# Altium PCB BEE-PC_EXP_V100.PcbDoc (part 7 of 7)
Units mm, origin at the board's own origin, x right, y up, seen from the top; angles counter-clockwise.
Board outline 180 x 79.98 mm, 6 copper layers (L1 TOP, L2 GND 1, L3 SIGNAL, L4 PWR, L5 GND 2, L6 BOT), stack 1.536 mm thick; 1146 components, 909 nets, 3933 pads, 1234 vias.
Unrouted connection lines stored in the file: 1783.
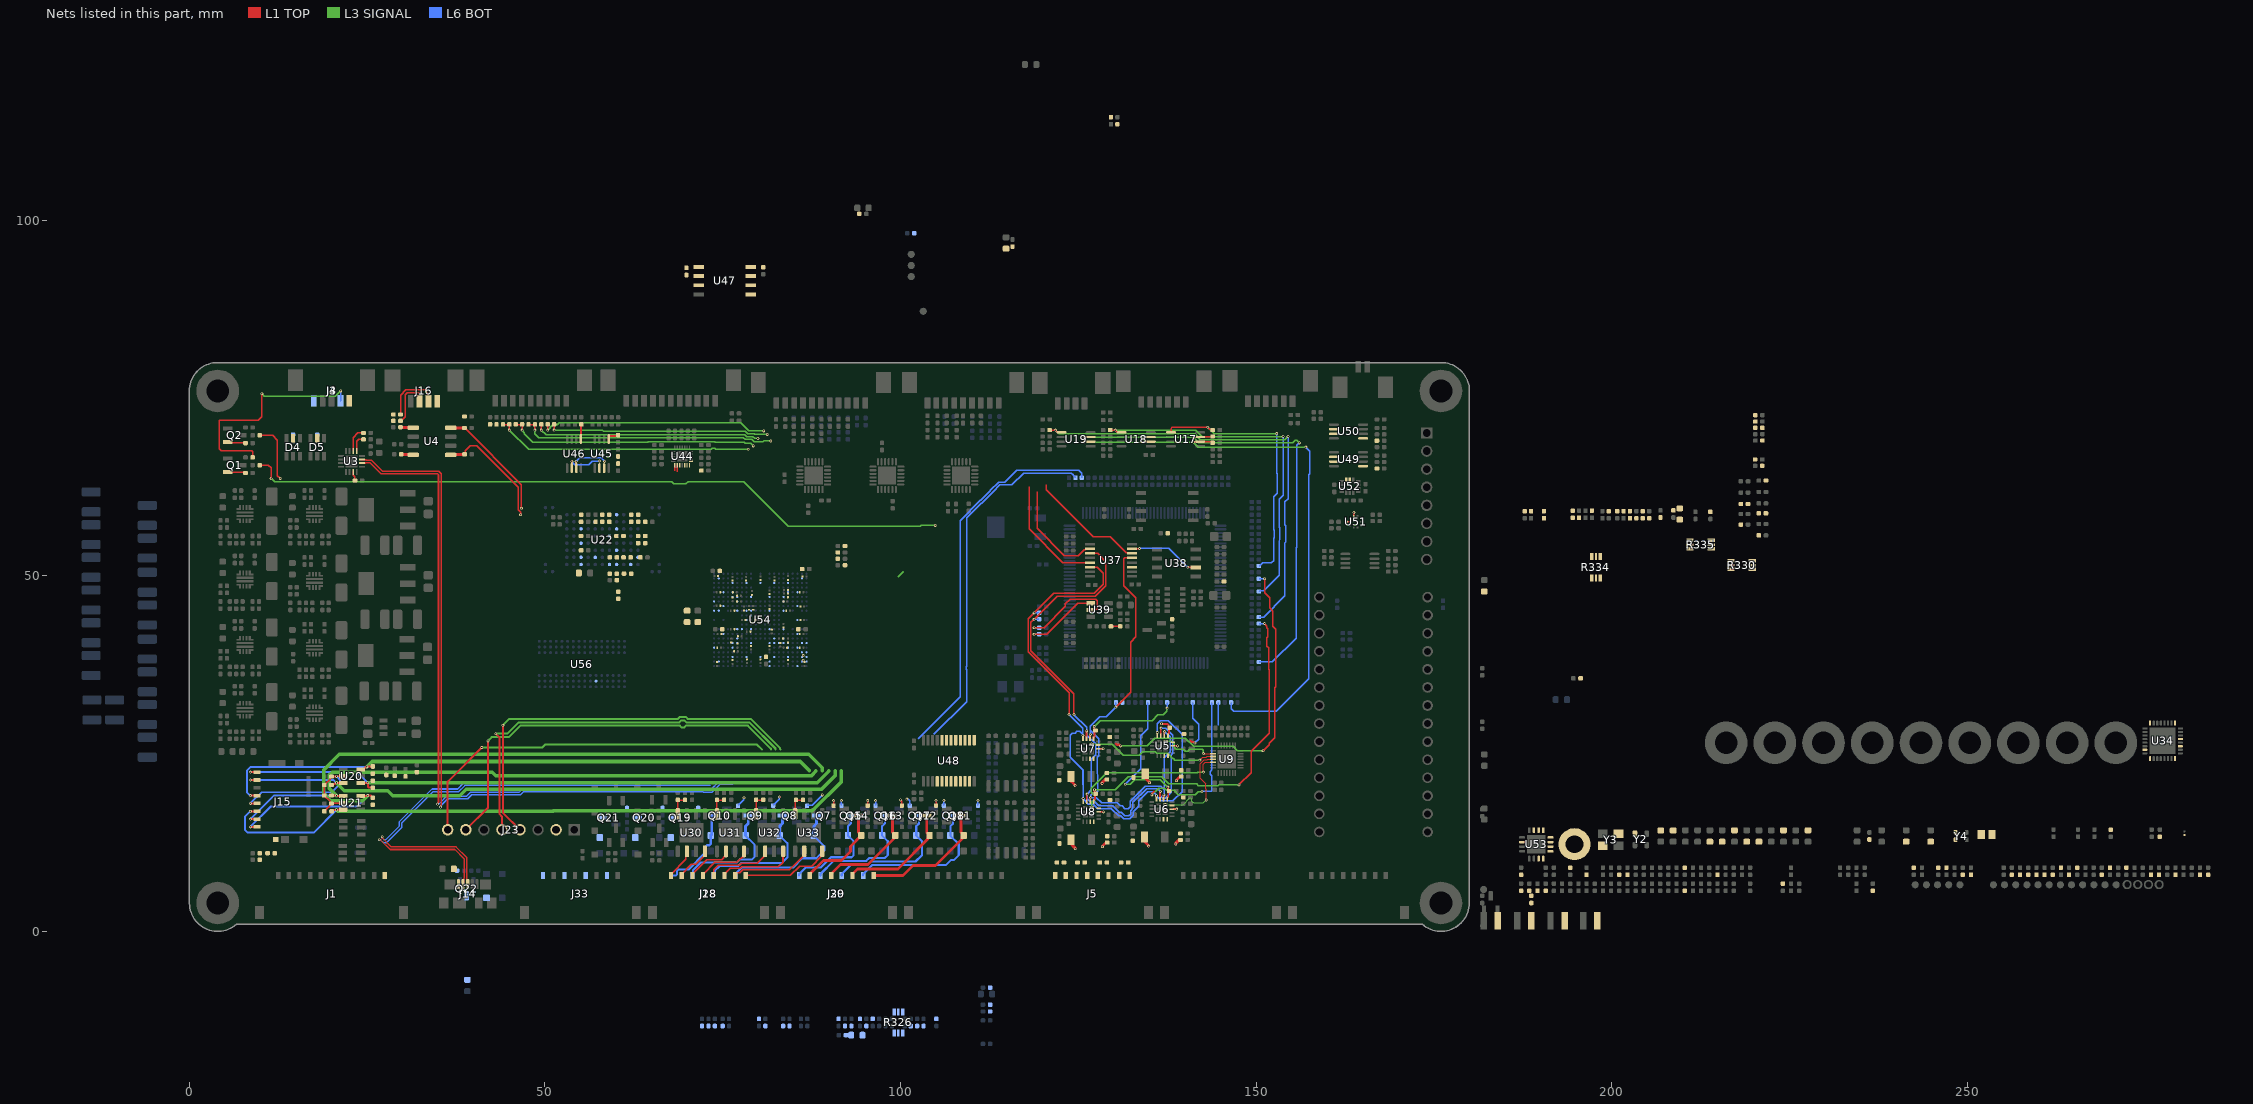
[diagram p7: the nets of this part, all layers, seen from the top]

## Via types
v1: diameter 0.6, hole 0.3, L1 TOP to L6 BOT, 563 vias
v2: diameter 0.4, hole 0.2, L1 TOP to L6 BOT, tented both sides, 344 vias
v3: diameter 0.4, hole 0.2, L1 TOP to L6 BOT, 327 vias

## Nets (pads, with @x,y where several pads share a name; then routed paths per layer and width w, separated by ;. In a path a pad name is that pad's centre, name@x,y a point inside that pad or via, vN(x,y) a via of type N, cw(c..) or ccw(c..) an arc to the next point about the centre after c; other vN are vias at no path point) (continued)
PRAM_SCK: U37.7 U38.6 | length 10.1
  L1 TOP w0.2: U37.7@132.565,53.837 133.593,53.837 v3(133.606,53.85) ; v3(140.4,51.2) 140.418,51.182 141.507,51.182 U38.6@141.524,51.165
  L6 BOT w0.2: v3(133.606,53.85) 137.75,53.85 v3(140.4,51.2)
SD2_CLK: J15.P5 R195.1 R544.1 U20.3 | length 86.6
  L1 TOP w0.28: v3(8.6,19.1) J15.P5@9.5,19.1 ; U20.3@24.134,22.775 24.444,22.775 24.792,23.123 24.956,23.123 25.002,23.169 25.744,23.169 R195.1@25.8,23.225
  L3 SIGNAL w0.5: v3(24.979,23.146) 25.733,23.9 85.9,23.9 87.2,22.6
  L6 BOT w0.28: v3(8.6,19.1) 8.11,19.59 8.11,22.603 8.653,23.146 v3(24.979,23.146)
SD2_CMD: J15.P3 R196.1 R541.1 U21.6 | length 94.1
  L1 TOP w0.28: v3(8.6,16.9) J15.P3@9.5,16.9 ; R196.1@20.025,16.9 20.179,17.054 20.621,17.054 20.668,17.1 v3(20.7,17.1) ; 20.904,17.125 U21.6@21.624,17.125
  L3 SIGNAL w0.5: v3(20.7,17.1) 20.924,16.876 51.109,16.876 51.233,17 81.417,17 81.467,16.95 87.599,16.95 91.7,21.051 91.7,22.6
  L6 BOT w0.28: v3(8.6,16.9) 7.8,16.1 7.8,14.3 8.2,13.9 17.5,13.9 v3(20.7,17.1)
SD2_DATA0: J15.P7 R191.1 R545.1 U20.6 | length 87.6
  L1 TOP w0.28: v3(8.6,21.3) J15.P7@9.5,21.3 ; R191.1@20.025,20.6 20.179,20.754 20.476,20.754 20.599,20.877 20.677,20.877 v3(20.7,20.9) 20.713,20.887 21.611,20.887 U20.6@21.624,20.875
  L3 SIGNAL w0.5: v3(20.7,20.9) 21.8,19.8 27.9,19.8 28.6,19.1 38.051,19.1 38.951,20 88.9,20 90.8,21.9 90.8,22.6
  L6 BOT w0.28: v3(8.6,21.3) 20.268,21.3 20.668,20.9 v3(20.7,20.9)
SD2_DATA1: J15.P8 R192.1 R552.1 U20.1 | length 85.9
  L1 TOP w0.28: v3(8.6,22.4) J15.P8@9.5,22.4 ; U20.1@24.134,20.875 24.147,20.887 25.087,20.887 v3(25.1,20.9) 25.1,20.374 25.264,20.21 25.765,20.21 R192.1@25.8,20.175
  L3 SIGNAL w0.5: v3(25.1,20.9) 88.29,20.9 89.9,22.51 89.9,22.6
  L6 BOT w0.28: v3(8.6,22.4) 23.6,22.4 v3(25.1,20.9)
SD2_DATA2: J15.P1 R193.1 R553.1 U21.3 | length 103.4
  L1 TOP w0.28: v3(8.6,14.7) J15.P1@9.5,14.7 ; U21.3@24.134,19.025 24.186,19.077 25.077,19.077 v3(25.1,19.1) 25.545,19.1 25.8,18.845 R193.1@25.8,18.825
  L3 SIGNAL w0.5: v3(25.1,19.1) 24.4,18.4 19.9,18.4 18.9,19.4 18.9,22.7 21.1,24.9 87.1,24.9 89,23 89,22.6
  L6 BOT w0.28: v3(8.6,14.7) 11.49,17.59 23.59,17.59 v3(25.1,19.1)
SD2_DATA3: J15.P2 R194.1 R554.1 U21.4 | length 88.4
  L1 TOP w0.28: v3(8.6,15.8) J15.P2@9.5,15.8 ; R194.1@20.025,19.1 v3(20.7,19.1) 20.723,19.077 21.572,19.077 U21.4@21.624,19.025
  L3 SIGNAL w0.5: v3(20.7,19.1) 19.7,20.1 19.7,22 20.1,22.4 42.6,22.4 43.1,21.9 87.49,21.9 88.1,22.51 88.1,22.6
  L6 BOT w0.28: v3(8.6,15.8) 11.9,19.1 v3(20.7,19.1)
SD2_nCD: J15.P9 R197.2 R555.1
SENSE1_N: R334.4 U53.12
SENSE1_P: R334.3 U53.11
SENSE2_N: R335.4 U53.14
SENSE2_P: R335.3 U53.13
SENSE3_N: R326.4 U53.7
SENSE3_P: R326.3 U53.8
SENSE4_N: R330.4 U53.9
SENSE4_P: R330.3 U53.10
SENSOR1_EN: R55.2 R178.1 U17.5 | length 37.2
  L1 TOP w0.2: U17.5@138.05,70.175 138.05,70.783 138.167,70.9 v3(143.2,70.9) 143.457,70.643 143.732,70.643 R178.1@143.875,70.5
  L3 SIGNAL w0.2: v3(143.2,70.9) 144.1,70 v3(152.9,70)
  L6 BOT w0.2: R55.2@150.45,51.4 150.502,51.4 150.802,51.7 150.811,51.7 150.961,51.85 152.15,51.85 152.458,52.158 152.458,55.29 152.55,55.382 152.55,56.418 152.458,56.51 152.458,61.094 152.95,61.586 152.95,61.7 152.95,64.389 152.9,64.439 v3(152.9,70)
SENSOR2_EN: R57.2 R182.1 U18.5 | length 49.3
  L1 TOP w0.2: R182.1@129.525,70.5 v3(130.231,70.5) 130.556,70.175 U18.5@131.102,70.175
  L3 SIGNAL w0.2: v3(130.231,70.5) 141.515,70.5 142.465,69.55 153.696,69.55 153.746,69.6 v3(153.8,69.6)
  L6 BOT w0.2: R57.2@150.45,47.8 150.525,47.875 151.075,47.875 153.258,50.058 153.258,54.959 153.35,55.051 153.35,56.749 153.258,56.841 153.258,60.763 153.8,61.305 153.8,61.7 v3(153.8,69.6)
SENSOR3_EN: R38.2 R111.1 U49.5 | length 22.7
  L1 TOP w0.25: v2(135.35,19.2) 135.379,19.229 135.379,19.415 135.663,19.7 135.675,19.7
  L3 SIGNAL w0.2: v2(135.35,19.2) 136.3,20.15 137.114,20.15 137.414,19.85 138.486,19.85 139.086,19.25 141.48,19.25 141.9,19.67 142.37,19.67 v3(142.4,19.7)
  L6 BOT w0.2: v3(142.4,19.7) 143.683,19.7 143.8,19.817 143.8,21.864 143.55,22.114 143.55,22.486 143.8,22.736 R38.2@143.8,32.175
SENSOR4_EN: R40.2 R507.1 U50.5
SENSOR5_EN: R58.2 R190.1 U19.5 | length 62.8
  L1 TOP w0.2: R190.1@121.007,70.5 v3(121.778,70.5) 122.103,70.175 U19.5@122.65,70.175
  L3 SIGNAL w0.2: v3(121.778,70.5) 122.316,69.962 141.374,69.962 142.186,69.15 154.05,69.15 v3(154.5,69.6)
  L6 BOT w0.2: R58.2@150.45,44.2 151.075,44.2 154.058,47.183 154.058,54.628 154.15,54.719 154.15,57.081 154.058,57.172 154.058,60.431 154.5,60.873 154.5,61.7 v3(154.5,69.6)
SENSOR_I2C1_SCL: R62.1 R171.2 U17.2 U18.2 U19.2 U49.2 U50.2 U51.2 U52.13 | length 83.3
  L1 TOP w0.2: v3(125.812,68.812) 125.867,68.812 125.913,68.859 U19.2@126.734,68.859 ; v3(134.265,68.812) 134.319,68.812 134.365,68.859 U18.2@135.186,68.859 ; v3(141.2,68.8) 141.254,68.8 141.3,68.846 142.121,68.846 U17.2@142.15,68.875 142.179,68.846 143.729,68.846 R171.2@143.875,68.7 ; U51.2@163.75,58.387 v3(163.75,58.9)
  L3 SIGNAL w0.2: v3(125.812,68.812) v3(134.265,68.812) 134.271,68.806 141.194,68.806 141.9,68.1 v3(157,68.1)
  L6 BOT w0.2: R62.1@146.5,32.175 146.5,31.3 146.85,30.95 152.816,30.95 157.4,35.534 157.4,61.7 157.4,64.198 157.55,64.348 157.55,67.55 v3(157,68.1)
SENSOR_I2C1_SDA: R59.1 R170.2 U17.3 U18.3 U19.3 U49.3 U50.3 U51.4 U52.14 | length 70.3
  L1 TOP w0.2: v3(125.812,69.513) 125.825,69.525 U19.3@126.75,69.525 ; v3(134.265,69.513) 134.277,69.525 U18.3@135.202,69.525 ; v3(141.2,69.5) 141.212,69.513 142.138,69.513 U17.3@142.15,69.525 142.179,69.554 143.829,69.554 R170.2@143.875,69.6 ; v3(162.7,57.6) U51.4@163.213,57.6
  L3 SIGNAL w0.2: v3(125.812,69.513) v3(134.265,69.513) 134.271,69.506 141.194,69.506 141.95,68.75 155.143,68.75 155.493,69.1 155.7,69.1 v3(156.1,68.7)
  L6 BOT w0.2: R59.1@150.45,37.9 152.3,37.9 155.658,41.258 155.658,53.965 155.75,54.057 155.75,68.343 156.1,68.693 v3(156.1,68.7)
SHDN: R304.1 U54.R9
SHIELD: H16.1 J1.11
SOL_1_OUT1: J18.1 U30.6 | length 4.3
  L1 TOP w0.2: J18.1@67.75,7.87 67.75,8.07 69.825,10.145 69.825,11.125 U30.6@69.965,11.265
SOL_1_OUT2: J18.2 U30.8 | length 5.1
  L1 TOP w0.2: J18.2@69.25,7.87 69.25,8.07 70.596,9.416 71.181,9.416 72.505,10.74 U30.8@72.505,11.265
SOL_1_VREF: R271.2 R272.1 U30.4 | length 3
  L1 TOP w0.2: U30.4@68.695,16.535 68.698,16.538 68.698,18.46 68.7,18.463 R272.1@69.8,18.463
SOL_2_OUT1: J18.3 U31.6 | length 6.5
  L1 TOP w0.2: J18.3@70.75,7.87 70.75,8.07 72.78,10.1 74.837,10.1 75.465,10.728 U31.6@75.465,11.253
SOL_2_OUT2: J18.4 U31.8 | length 7.6
  L1 TOP w0.2: J18.4@72.25,7.87 72.25,8.07 73.88,9.7 76.977,9.7 78.005,10.728 U31.8@78.005,11.253
SOL_2_VREF: R274.2 R275.1 U31.4 | length 3
  L1 TOP w0.2: U31.4@74.195,16.523 74.198,16.525 74.198,18.448 74.2,18.451 R275.1@75.3,18.451
SOL_3_OUT1: J18.5 U32.6 | length 9.4
  L1 TOP w0.2: J18.5@73.75,7.87 73.75,8.67 74.38,9.3 77.324,9.3 77.64,9.616 79.841,9.616 80.965,10.74 U32.6@80.965,11.265
SOL_3_OUT2: J18.6 U32.8 | length 10.7
  L1 TOP w0.2: J18.6@75.25,7.87 75.25,8.07 76.08,8.9 77.49,8.9 77.66,9.07 82.85,9.07 83.505,9.725
  L1 TOP w0.28: 83.505,9.725 U32.8@83.505,11.265
SOL_3_VREF: R277.2 R278.1 U32.4 | length 3
  L1 TOP w0.2: U32.4@79.695,16.535 79.698,16.538 79.698,18.46 79.7,18.463 R278.1@80.8,18.463
SOL_4_OUT1: J18.7 U33.6 | length 11.5
  L1 TOP w0.2: J18.7@76.75,7.87 76.75,8.07 76.95,8.27 77.426,8.27 77.826,8.67 84.395,8.67 85.135,9.41
  L1 TOP w0.28: 85.135,9.41 86.465,10.74 U33.6@86.465,11.265
SOL_4_OUT2: J18.8 U33.8 | length 12.5
  L1 TOP w0.2: J18.8@78.25,7.87 84.526,7.87 85.856,9.2 87.5,9.2 88.81,10.51 88.81,10.519 88.996,10.705 U33.8@89.005,10.705
  L1 TOP w0.28: U33.8@89.005,10.705 U33.8@89.005,11.265
SOL_4_VREF: R280.2 R281.1 U33.4 | length 3
  L1 TOP w0.2: U33.4@85.195,16.535 85.198,16.538 85.198,18.46 85.2,18.463 R281.1@86.3,18.463
SOLENOID_A_1: DZ1.1 J28.2 Q7.3 | length 19.8
  L6 BOT w0.3: J28.2@76.75,7.87 76.75,8.07 77.68,9 84.893,9 86.193,10.3 88.182,10.3 89.3,11.418 89.3,11.995 87.82,13.475 DZ1.1@87.82,13.5
  L6 BOT w0.4: DZ1.1@87.82,13.525 87.82,14.798 88.2,15.178 Q7.3@88.2,16.3
SOLENOID_A_2: DZ2.1 J28.4 Q8.3 | length 18.2
  L6 BOT w0.3: J28.4@73.75,7.87 73.9,8.02 73.9,8.524 74.576,9.2 77.173,9.2 77.573,9.6 83.3,9.6 84.1,10.4 84.1,12.395 83.02,13.475 DZ2.1@83.02,13.5
  L6 BOT w0.4: DZ2.1@83.02,13.525 83.02,14.797 83.4,15.177 Q8.3@83.4,16.3
SOLENOID_A_3: DZ3.1 J28.6 Q9.3 | length 16.7
  L6 BOT w0.3: J28.6@70.75,7.87 70.828,7.948 70.828,8.628 71.9,9.7 76.966,9.7 77.366,10.1 79.106,10.1 79.5,10.494 79.5,12.195 78.22,13.475 DZ3.1@78.22,13.5
  L6 BOT w0.4: DZ3.1@78.22,13.525 78.22,14.797 78.6,15.177 Q9.3@78.6,16.3
SOLENOID_A_4: DZ4.1 J28.8 Q10.3 | length 12.4
  L6 BOT w0.3: J28.8@67.75,7.87 68.424,7.87 68.6,8.046 68.6,8.515 68.805,8.72 70.213,8.72 72.52,11.027 72.52,11.862 72.783,12.125 73.144,12.125 73.32,12.301 DZ4.1@73.32,13.5
  L6 BOT w0.4: DZ4.1@73.32,13.525 73.46,13.665 73.46,16.2 73.56,16.3 Q10.3@73.7,16.3
SOLENOID_A_5: DZ5.1 J29.2 Q11.3 | length 20.9
  L6 BOT w0.3: J29.2@94.75,7.87 94.75,8.07 96.005,9.325 106.382,9.325 107.084,10.027 107.498,10.027 108.2,10.729 108.2,12.295 107.02,13.475 DZ5.1@107.02,13.5 ; DZ5.1@107.02,13.525 107.02,14.798 107.4,15.178 Q11.3@107.4,16.3
SOLENOID_A_6: DZ6.1 J29.4 Q12.3 | length 18.6
  L6 BOT w0.3: J29.4@91.75,7.87 91.75,8.07 93.105,9.425 95.398,9.425 95.798,9.825 102.107,9.825 103.02,10.738 103.02,12.675 102.22,13.475 DZ6.1@102.22,13.5 ; DZ6.1@102.22,13.525 102.22,14.798 102.6,15.178 Q12.3@102.6,16.3
SOLENOID_A_7: DZ7.1 J29.6 Q13.3 | length 16.8
  L6 BOT w0.3: J29.6@88.75,7.87 88.75,8.07 90.605,9.925 95.191,9.925 95.591,10.325 97.807,10.325 98.22,10.738 98.22,12.675 97.42,13.475 DZ7.1@97.42,13.5 ; DZ7.1@97.42,13.525 97.42,14.798 97.8,15.178 Q13.3@97.8,16.3
SOLENOID_A_8: DZ8.1 J29.8 Q14.3 | length 15
  L6 BOT w0.3: J29.8@85.75,7.87 85.75,8.07 86.68,9 88.8,9 90.225,10.425 93.107,10.425 93.42,10.738 93.42,12.675 92.62,13.475 DZ8.1@92.62,13.5 ; DZ8.1@92.62,13.525 92.62,14.798 93,15.178 Q14.3@93,16.3
SOLENOID_A_9: DZ9.1 J30.2 Q15.3 | length 13.1
  L1 TOP w0.4: J30.2@87.25,7.87 87.25,8.07 89.18,10 91.7,10 92.965,11.265 92.965,11.96 94.48,13.475 DZ9.1@94.48,13.5 94.48,13.525 94.1,13.905 Q15.3@94.1,16.3
SOLENOID_A_10: DZ10.1 J30.4 Q16.3 | length 14.6
  L1 TOP w0.4: J30.4@90.25,7.87 90.25,8.07 91.58,9.4 95.448,9.4 99.03,12.982 99.03,13.25 DZ10.1@99.28,13.5 99.28,13.525 98.9,13.905 Q16.3@98.9,16.3
SOLENOID_A_11: DZ11.1 J30.6 Q17.3 | length 16.4
  L1 TOP w0.4: J30.6@93.25,7.87 93.25,8.07 93.98,8.8 99.648,8.8 103.83,12.982 103.83,13.25 DZ11.1@104.08,13.5 104.08,13.525 103.7,13.905 Q17.3@103.7,16.3
SOLENOID_A_12: DZ12.1 J30.8 Q18.3 | length 18.1
  L1 TOP w0.4: J30.8@96.25,7.87 100.351,7.87 101.777,9.295 104.944,9.295 108.63,12.982 108.63,13.25 DZ12.1@108.88,13.5 108.88,13.525 108.5,13.905 Q18.3@108.5,16.3
SOLENOID_A_13: DZ13.1 J33.2 Q19.3
SOLENOID_A_14: DZ14.1 J33.4 Q20.3
SOLENOID_A_15: DZ15.1 J33.6 Q21.3
SOLENOID_A_16: DZ16.1 J33.8 Q22.3
SOLENOID_CTR_1: R479.2 U48.16 | length 0.7
  L6 BOT w0.2: R479.2@91.7,17.725 v3(91.7,18.4)
SOLENOID_CTR_2: R480.2 U48.8 | length 2.7
  L6 BOT w0.2: R480.2@86.9,17.725 87.561,17.725 89,19.164 v3(89,19.2)
SOLENOID_CTR_3: R481.2 U48.6 | length 1.5
  L6 BOT w0.2: R481.2@82.1,17.725 82.1,17.75 82.962,18.612 82.962,18.862 v3(83,18.9)
SOLENOID_CTR_4: R482.2 U48.4 | length 1.4
  L6 BOT w0.2: R482.2@77.2,17.725 77.2,17.75 77.962,18.512 77.962,18.762 v3(78,18.8)
SOLENOID_CTR_5: R487.2 U48.7 | length 0.7
  L6 BOT w0.2: R487.2@110.9,17.725 v3(110.9,18.4)
SOLENOID_CTR_6: R488.2 U48.9 | length 0.7
  L6 BOT w0.2: R488.2@106.1,17.725 v3(106.1,18.4)
SOLENOID_CTR_7: R489.2 U48.14 | length 1.1
  L6 BOT w0.2: v3(100.9,18.6) 100.938,18.562 101.088,18.562 101.3,18.35 R489.2@101.3,17.725
SOLENOID_CTR_8: R490.2 U48.15 | length 0.7
  L6 BOT w0.2: R490.2@96.5,17.725 v3(96.5,18.4)
SOLENOID_CTR_9: R495.2 U48.13 | length 0.7
  L1 TOP w0.2: R495.2@90.6,17.725 v3(90.6,18.4)
SOLENOID_CTR_10: R496.2 U48.11 | length 0.7
  L1 TOP w0.2: R496.2@95.4,17.725 v3(95.4,18.4)
SOLENOID_CTR_11: R497.2 U48.10 | length 0.9
  L1 TOP w0.2: v3(100,18.5) 100,18.49 100.2,18.29 R497.2@100.2,17.725
SOLENOID_CTR_12: R498.2 U48.5 | length 0.7
  L1 TOP w0.2: R498.2@105,17.725 v3(105,18.4)
SOLENOID_CTR_13: R508.2 U48.17
SOLENOID_CTR_14: R509.2 U48.18
SOLENOID_CTR_15: R510.2 U48.19
SOLENOID_CTR_16: R511.2 U48.20
SOM_CAM_CK_N: R349.1 U44.7 | length 0.9
  L1 TOP w0.18: 68.59,64.659 68.59,65.326 68.6,65.336 U44.7@68.6,65.55
SOM_CAM_CK_P: R351.1 U44.6 | length 0.8
  L1 TOP w0.18: U44.6@68.25,65.55 68.25,65.336 68.26,65.326 68.26,64.795
SOM_CAM_D0_N: R353.1 U44.10
SOM_CAM_D0_P: R355.1 U44.8
SOM_CAM_D1_N: R356.1 U44.12
SOM_CAM_D1_P: R357.1 U44.11
SOM_CAM_I2C_EN1: R466.1 R565.1 U45.5 | length 1.8
  L1 TOP w0.28: U45.5@58.975,69.25 58.975,69.605 59.007,69.637 60.136,69.637 60.295,69.796 R466.1@60.295,69.816
SOM_CAM_I2C_EN2: R473.1 R566.1 U46.5 | length 2
  L1 TOP w0.28: U46.5@55.075,69.25 55.075,69.55 55.088,69.563 55.088,71.237 R473.1@55.127,71.275
SOM_CAM_I2C_SCL: R459.2 R558.1 U45.2 U46.2 | length 5.3
  L1 TOP w0.2: U46.2@53.775,65.15 53.788,65.162 53.788,66.088 v3(53.8,66.1)
  L6 BOT w0.2: v3(53.8,66.1) 53.8,66.064 54.214,65.65 56.164,65.65 56.664,66.15 v3(57.675,66.15)
SOM_CAM_I2C_SDA: R458.2 R559.1 U45.3 U46.3 | length 5.4
  L1 TOP w0.2: v3(54.4,66.1) 54.413,66.087 54.413,65.162 U46.3@54.425,65.15
  L6 BOT w0.2: v3(54.4,66.1) 54.9,66.6 57.9,66.6 v3(58.4,66.1)
SOM_CAM_MIPI_SEL: R319.2 R567.1 U44.13
SOM_CONSOLE_RX: J16.3 R210.1 R557.1 | length 7.2
  L1 TOP w0.2: R210.1@29.725,71.8 29.777,71.8 30.077,72.1 30.086,72.1 30.361,72.375 30.361,75.468 30.636,75.742 32.258,75.742 32.375,75.625 J16.3@32.375,74.55
SOM_CONSOLE_TX: J16.2 R209.1 R556.1 | length 8.2
  L1 TOP w0.2: R209.1@29.725,72.7 29.725,75.397 30.47,76.142 33.184,76.142 33.625,75.701 J16.2@33.625,74.55
SOM_EMMC_nRST: R208.1 R374.1 U22.M5@61.086,55.6
SOM_MRAM_QSPI_CLK: R468.1 U47.6
SOM_MRAM_QSPI_IO0: R465.1 U47.5
SOM_MRAM_QSPI_IO1: R464.1 U47.2
SOM_MRAM_QSPI_IO2: R462.1 U47.3
SOM_MRAM_QSPI_IO3: R456.1 U47.7
SOM_PHOTO_ADC_CONV: R301.2 R316.1 R470.1 | length 36.5
  L1 TOP w0.2: R316.1@44.1,71.275 45,71.275 v3(45,70.5)
  L3 SIGNAL w0.2: v3(45,70.5) 47.7,67.8 73.364,67.8 73.514,67.95 73.886,67.95 74.036,67.8 v3(78.6,67.8)
SOM_PHOTO_ADC_EOC: R302.2 R317.1 R560.1
SOM_PHOTO_ADC_nCS: R300.2 R315.1 R383.1 | length 35.3
  L1 TOP w0.2: R315.1@45.9,71.275 46.8,71.275 v3(46.8,70.5)
  L3 SIGNAL w0.2: v3(46.8,70.5) 46.8,70.446 47.1,70.146 47.1,70 48.3,68.8 64.464,68.8 64.514,68.85 73.886,68.85 73.936,68.8 78.003,68.8 78.168,68.635 78.936,68.635 v3(79.3,68.271)
SOM_PHOTO_SPI_MISO: R311.1 R377.1 | length 31.7
  L1 TOP w0.2: v3(49.5,70.5) R311.1@49.5,71.275
  L3 SIGNAL w0.2: v3(49.5,70.5) 50.158,69.842 78.092,69.842 78.355,69.579 79.26,69.579 79.483,69.356 79.912,69.356 v3(79.95,69.318)
SOM_PHOTO_SPI_MOSI: R309.1 R375.1 | length 32.1
  L1 TOP w0.2: v3(50.4,70.5) R309.1@50.4,71.275
  L3 SIGNAL w0.2: v3(50.4,70.5) 51.125,71.225 51.75,71.225 52.05,71.525 77.541,71.525 78.687,70.379 v3(80.78,70.379)
SOM_PHOTO_SPI_SCK: R307.1 R380.1 | length 31
  L1 TOP w0.2: v3(51.3,70.5) R307.1@51.3,71.275
  L3 SIGNAL w0.2: v3(51.3,70.5) 58.064,70.5 58.264,70.3 78.2,70.3 78.521,69.979 79.426,69.979 79.507,69.898 v3(81.27,69.898)
SOM_PHOTO_SW_nCS: R299.2 R313.1 R373.1 | length 35.8
  L1 TOP w0.2: R313.1@47.7,71.275 48.6,71.275 v3(48.6,70.5)
  L3 SIGNAL w0.2: v3(48.6,70.5) 48.6,70 49.158,69.442 77.927,69.442 78.19,69.179 79.095,69.179 79.406,68.868 80.687,68.868 80.783,68.964 v3(81.76,68.964)
SOM_PRAM_nCS: R530.1 R538.1 U37.3
SOM_PRAM_SPI_MISO: R540.1 U37.13 | length 16.4
  L1 TOP w0.2: 118.1,62.5 118.1,56.6 122.825,51.875 U37.13@126.647,51.875
SOM_PRAM_SPI_MOSI: R539.1 U37.10 | length 14.6
  L1 TOP w0.2: 119.2,61.8 119.2,56.689 123.054,52.835 125,52.835 125.818,53.653 125.948,53.653 126.12,53.825 U37.10@126.647,53.825
SOM_PRAM_SPI_SCK: R537.1 U37.6 | length 16.4
  L1 TOP w0.2: 120.5,62.8 120.5,62.1 127.1,55.5 129.5,55.5 131.747,53.253 132.475,53.253 U37.6@132.553,53.175
SOM_RAM_QSPI_nCS: R467.1 R469.1 U47.1
SOM_SDMMC0_OUT_CK: R207.1 R371.1 U22.P6@63.086,54.6
SOM_SDMMC0_OUT_CMD: R206.1 R372.1 U22.P5@63.086,55.6
SOM_SDMMC0_OUT_D0: R205.1 R376.1 U22.K2@59.086,58.6
SOM_SDMMC0_OUT_D1: R204.1 R378.1 U22.N2@62.086,58.6
SOM_SDMMC0_OUT_D2: R203.1 R381.1 U22.K3@59.086,57.6
SOM_SDMMC0_OUT_D3: R202.1 R384.1 U22.N3@62.086,57.6
SOM_SDMMC0_OUT_D4: R201.1 R386.1 U22.N8@62.086,52.6
SOM_SDMMC0_OUT_D5: R200.1 R404.1 U22.K8@59.086,52.6
SOM_SDMMC0_OUT_D6: R199.1 R455.1 U22.N9@62.086,51.6 | length 1
  L3 SIGNAL w0.25: 99.7,49.862 100.4,50.562
SOM_SDMMC0_OUT_D7: R198.1 R457.1 U22.K9@59.086,51.6
SOM_SDMMC0_OUT_DS: R463.1 U22.K5@59.086,55.6
SOM_USB_LED_1: R86.1 R568.1 | length 99.7
  L1 TOP w0.2: R86.1@9.925,65.564 11.136,65.564 11.5,65.2 v3(11.5,63.7)
  L3 SIGNAL w0.2: v3(11.5,63.7) 12,63.2 67.836,63.2 68.086,62.95 69.836,62.95 70.136,63.25 77.94,63.25 84.19,57 102.8,57 102.9,57.1 v3(104.9,57.1)
SOM_USB_LED_2: R91.1 R475.1 | length 8.3
  L1 TOP w0.2: R91.1@9.925,69.764 11.736,69.764 12.4,69.1 12.4,64.1 v3(12.8,63.7)
SOM_USB_N: R345.1 U3.3 | length 101.5
  L1 TOP w0.22: U3.3@24.27,66.35 24.29,66.33 24.796,66.33 24.841,66.285 25.573,66.285 27.158,64.7 35.069,64.7 35.414,64.354 35.414,17.764 35.359,17.708 35.359,17.51 v3(35.324,17.476)
  L6 BOT w0.22: v3(35.324,17.476) 35.359,17.51 35.359,17.673 36.35,18.664 39.15,18.664 39.716,19.23 46.579,19.23 47.009,19.66 72.245,19.66 72.351,19.553 73.477,19.553 74.631,20.708 76.431,20.708
SOM_USB_P: R346.1 U3.2 | length 100.7
  L1 TOP w0.22: U3.2@24.27,65.85 24.29,65.87 24.796,65.87 24.841,65.915 25.419,65.915 27.004,64.33 34.915,64.33 35.044,64.201 35.044,18.093 34.9,17.949 v3(34.9,17.9)
  L6 BOT w0.22: v3(34.9,17.9) 34.934,17.934 35.097,17.934 36.197,19.034 38.997,19.034 39.563,19.6 46.426,19.6 46.856,20.03 72.398,20.03 72.504,19.923 73.323,19.923 74.478,21.078 76.278,21.078
SOM_USB_PWR_EN1: R96.1 R387.1 U4.1 | length 16.6
  L1 TOP w0.2: R96.1@38.675,67.1 38.768,67.193 38.768,67.568 39.5,68.3 40.4,68.3 46.25,62.45 46.25,59.314 46.595,58.969 v3(46.595,58.6)
  L1 TOP w0.4: U4.1@36.76,67.016 36.802,67.058 R96.1@38.633,67.058
SOM_USB_PWR_EN2: R95.1 R454.1 U4.4 | length 16.6
  L1 TOP w0.2: R95.1@38.675,70.8 R95.1@38.7,70.8 46.7,62.8 46.7,61.7 v3(46.7,59.5)
  L1 TOP w0.4: U4.4@36.76,70.826 36.773,70.813 38.662,70.813 R95.1@38.675,70.8
SOM_USB_SW_nOE: R84.2 R379.1 U3.15 | length 1.3
  L1 TOP w0.2: U3.15@23.05,64.63 23.08,64.6 23.08,64.136 23.275,63.941 R84.2@23.275,63.4
SOM_USB_SW_SEL0: R89.1 R382.1 U3.6 | length 3.6
  L1 TOP w0.2: U3.6@23.05,67.57 23.05,69.45 23.7,70.1 R89.1@24.475,70.1
SOM_USB_SW_SEL1: R88.1 R385.1 U3.5 | length 2.4
  L1 TOP w0.2: U3.5@23.55,67.57 23.55,68.95 23.8,69.2 R88.1@24.475,69.2
TCK_SWCLK_PC26: J23.5 U54.H7 | length 55.7
  L1 TOP w0.28: v3(43.1,27.8) 43.59,27.31 43.59,16.531 43.96,16.161 J23.5@43.96,14.3
  L3 SIGNAL w0.28: v3(43.1,27.8) 44.73,27.8 46.338,29.408 68.915,29.408 69.197,29.69 69.603,29.69 69.885,29.408 78.743,29.408 82.427,25.724 82.427,25.623 82.45,25.6
TDI_PC28: J23.4 U54.H6 | length 57.1
  L1 TOP w0.28: v3(44.1,29) 44.1,16.7 J23.4@46.5,14.3
  L3 SIGNAL w0.28: v3(44.1,29) 44.988,29.888 68.716,29.888 68.998,30.17 69.802,30.17 70.084,29.888 78.942,29.888 83.077,25.752 83.077,25.623 83.1,25.6
TDO_PC29: J23.7 U54.A2 | length 56.1
  L1 TOP w0.28: J23.7@38.88,14.3 42,17.42 v3(42,26.8)
  L3 SIGNAL w0.28: v3(42,26.8) 42.51,27.31 44.919,27.31 46.537,28.928 68.979,28.928 69.197,28.71 69.603,28.71 69.821,28.928 78.544,28.928 81.777,25.695 81.777,25.623 81.8,25.6
TEC_ADC_1: U5.20 U9.2 | length 8.1
  L1 TOP w0.15: v3(142.6,25) U9.2@143.965,25
  L3 SIGNAL w0.2: v2(137.325,26.75) 138.15,26.75 138.5,26.4 138.5,25.914 138.789,25.625 139.739,25.625 140.014,25.35 140.386,25.35 140.661,25.625 142.414,25.625 142.562,25.478 142.562,25.038 v3(142.6,25)
TEC_ADC_2: U7.20 U9.3 | length 18.7
  L1 TOP w0.15: v3(142.1,24.1) 142.485,24.485 143.024,24.485 143.139,24.6 U9.3@143.965,24.6
  L3 SIGNAL w0.2: v2(126.875,26.35) 129.75,26.35 131.3,24.8 133.6,24.8 134.1,25.3 135.814,25.3 136.064,25.05 137.036,25.05 137.599,25.05 138.1,24.549 138.1,24.514 138.364,24.25 138.399,24.25 138.549,24.1 v3(142.1,24.1)
TEC_ADC_3: U6.20 U9.4 | length 14.3
  L1 TOP w0.15: v3(142.988,18.488) 142.988,20.012 142.9,20.1 142.9,20.8 142.175,21.525 142.175,23.57 142.74,24.135 143.169,24.135 143.234,24.2 U9.4@143.965,24.2
  L3 SIGNAL w0.15: v2(137.225,17.85) 139.75,17.85 140.7,18.8 140.824,18.8 140.975,18.649 140.975,18.324 141.224,18.075 142.575,18.075 v3(142.988,18.488)
TEC_ADC_4: U8.20 U9.5 | length 22.3
  L1 TOP w0.15: v3(142.6,22.4) 142.6,23.5 142.885,23.785 143.95,23.785 U9.5@143.965,23.8
  L3 SIGNAL w0.2: v2(126.911,17.468) 126.911,18.14 127.3,18.529 127.3,19.1 126.836,19.564 126.836,20.105 129.032,22.3 141.7,22.3 141.8,22.4 v3(142.6,22.4)
TEC_nCS_1: R68.2 R97.2 U5.15 | length 5.8
  L1 TOP w0.25: v2(136.7,29.2) 136.712,29.188 137.527,29.188 137.673,29.041 137.673,28.652 137.75,28.575 137.75,27.86 137.6,27.71 U5.15@137.6,27.51
  L6 BOT w0.2: 144.7,29 R68.2@144.7,32.175
TEC_nCS_2: R70.2 R107.2 U7.15 | length 14.1
  L1 TOP w0.25: U7.15@127.15,27.11 127.15,27.31 127.3,27.46 127.3,28.175 127.263,28.212 127.263,28.788 v2(127.25,28.8)
  L3 SIGNAL w0.2: v2(127.25,28.8) 128.1,29.65 135.382,29.65 136.182,30.45 136.952,30.45 137.462,30.96 137.462,31.362 v3(137.5,31.4)
  L6 BOT w0.2: v3(137.5,31.4) R70.2@137.5,32.175
TEC_nCS_3: R72.2 R98.2 U6.15 | length 21.3
  L1 TOP w0.25: U6.15@137.5,18.61 137.5,18.81 137.65,18.96 137.65,19.675 137.612,19.712 137.612,20.288 v2(137.6,20.3)
  L3 SIGNAL w0.2: v3(131.6,20.7) 132.278,20.7 132.928,21.35 136.55,21.35 v2(137.6,20.3)
  L6 BOT w0.2: v3(131.6,20.7) 133.8,22.9 133.8,27.486 134.8,28.487 R72.2@134.8,32.175
TEC_nCS_4: R20.1 R108.2 U8.15 | length 49
  L1 TOP w0.2: v3(147.6,20.6) 149.3,22.3 149.3,25.336 151.86,27.897 151.86,36.767 151.75,36.877 151.75,39.886 151.5,40.136 151.5,41.308 151.65,41.458 151.65,42.586 151.5,42.736 151.5,42.946 151.2,43.246 v3(151.2,43.3)
  L1 TOP w0.25: U8.15@127.186,18.228 127.186,18.428 127.336,18.578 127.336,19.293 127.299,19.331 127.299,19.906 v2(127.286,19.918)
  L3 SIGNAL w0.2: v2(127.286,19.918) 130.182,19.918 132.014,21.75 136.716,21.75 137.716,20.75 141.65,20.75 141.9,20.5 144.673,20.5 144.773,20.6 v3(147.6,20.6)
  L6 BOT w0.2: R20.1@150.45,43.3 v3(151.2,43.3)
TEC_OUT_A_1: C39.2 C40.2 C51.2 J5.5 U5.8 U5.9 | length 0.8
  L1 TOP w0.4: v2(138.8,21.2) 138.8,21.298 139.302,21.8 C40.2@139.325,21.8
TEC_OUT_A_2: C61.2 C62.2 C73.2 J5.1 U7.8 U7.9 | length 0.8
  L1 TOP w0.4: v2(128.35,20.8) 128.35,20.898 128.852,21.4 C62.2@128.875,21.4
TEC_OUT_A_3: C41.2 C42.2 C52.2 J5.7 U6.8 U6.9 | length 0.8
  L1 TOP w0.4: v2(138.7,12.3) 138.7,12.398 139.202,12.9 C42.2@139.225,12.9
TEC_OUT_A_4: C63.2 C64.2 C74.2 J5.3 U8.8 U8.9 | length 0.8
  L1 TOP w0.4: v2(128.386,11.918) 128.386,12.016 128.888,12.518 C64.2@128.911,12.518
TEC_OUT_B_1: C51.1 C57.2 J5.6 L1.2 U5.12 | length 1.9
  L1 TOP w0.25: U5.12@138.475,26.1 v2(138.95,26.1)
  L1 TOP w0.4: L1.2@134.189,22.032 134.189,21.782 135,20.97 v2(135,20.9)
TEC_OUT_B_2: C73.1 C79.2 J5.2 L3.2 U7.12 | length 1.9
  L1 TOP w0.25: U7.12@128.025,25.7 v2(128.5,25.7)
  L1 TOP w0.4: L3.2@123.739,21.632 123.739,21.382 124.55,20.57 v2(124.55,20.5)
TEC_OUT_B_3: C52.1 C58.2 J5.8 L2.2 U6.12 | length 1.9
  L1 TOP w0.25: U6.12@138.375,17.2 v2(138.85,17.2)
  L1 TOP w0.4: L2.2@134.089,13.132 134.089,12.882 134.9,12.07 v2(134.9,12)
TEC_OUT_B_4: C74.1 C80.2 J5.4 L4.2 U8.12 | length 1.9
  L1 TOP w0.25: U8.12@128.061,16.818 v2(128.536,16.818)
  L1 TOP w0.4: L4.2@123.775,12.75 123.775,12.5 124.586,11.688 v2(124.586,11.618)
TEC_SPI_MISO: R76.2 R79.1 U5.18 U6.18 U7.18 U8.18 U37.14 | length 82.9
  L1 TOP w0.2: v3(123.7,30.5) 123.7,33.552 117.95,39.302 117.95,43.95 v3(118.8,44.8) 121.545,47.545 127.231,47.545 128.492,48.806 128.492,50.385 127.652,51.225 U37.14@126.647,51.225
  L6 BOT w0.2: v3(118.8,44.8) R76.2@119.475,44.8 ; v3(123.7,30.5) 125.612,28.588 125.612,27.763 125.65,27.725 v2(125.65,27.573) ; v2@125.612,27.725 125.186,28.15 124.814,28.15 124.564,27.9 124.164,27.9 123.85,27.586 123.85,24.514 125.65,22.713 ; 125.65,20.6 125.65,22.713 ; v2(136.1,27.973) 136.1,29.236 136.514,29.65 137.686,29.65 139.6,27.736 139.6,19.664 138.286,18.35 136.698,18.35 136,19.048 v2(136,19.073) 135.962,19.111 135.962,19.225 135.536,19.65 134.763,19.65 133.508,18.394 133.508,17.594 132.75,16.836 132.75,16.348 132.252,15.85 131.391,15.85 130.973,16.268 130.673,16.268 129.673,17.268 127.748,17.268 127.098,17.918 126.434,17.918 125.686,18.666 v2(125.686,18.691) 125.686,22.677 125.65,22.713
TEC_SPI_MOSI: R77.2 U5.17 U6.17 U7.17 U8.17 U37.11 | length 79.6
  L1 TOP w0.2: v3(124.4,30.5) 124.4,33.418 118.35,39.468 118.35,43.45 v3(118.8,43.9) 122.045,47.145 127.397,47.145 128.892,48.64 128.892,51.994 127.711,53.175 U37.11@126.647,53.175
  L1 TOP w0.25: U7.17@126.15,27.11 126.15,28.11 126.2,28.159 v2(126.2,28.2) ; U8.17@126.186,18.228 126.186,19.228 126.236,19.278 v2(126.236,19.318) ; U6.17@136.5,18.61 136.5,19.61 136.55,19.659 v2(136.55,19.7) ; U5.17@136.6,27.51 136.6,28.51 136.65,28.559 v2(136.65,28.6)
  L6 BOT w0.2: v3(118.8,43.9) R77.2@119.475,43.9 ; v3(124.4,30.5) 126.2,28.7 v2(126.2,28.2) 126.2,27.564 126.795,26.969 126.893,26.969 127.45,26.412 127.45,24.852 126.836,24.238 126.836,19.918 v2(126.236,19.318) 126.236,18.682 126.6,18.318 127.263,18.318 127.914,17.668 129.838,17.668 130.738,16.768 131.038,16.768 131.557,16.25 132.086,16.25 132.35,16.514 132.35,17.002 132.684,17.336 132.684,18.136 134.598,20.05 136.193,20.05 136.543,19.7 v2(136.55,19.7) 136.55,19.064 136.864,18.75 137.236,18.75 138.05,19.564 138.05,24.836 138.3,25.086 138.3,27.586 137.286,28.6 v2(136.65,28.6)
TEC_SPI_SCK: R74.2 U5.16 U6.16 U7.16 U8.16 U37.5 | length 66
  L1 TOP w0.2: v3(130.3,31.55) 132.35,33.6 132.35,40.686 133.1,41.436 133.1,46.944 131.431,48.614 131.431,52.408 131.548,52.525 U37.5@132.553,52.525
  L1 TOP w0.25: U7.16@126.65,27.11 126.65,27.609 126.7,27.659 v2(126.7,27.7) ; U8.16@126.686,18.228 126.686,18.728 126.736,18.778 v2(126.736,18.818) ; U6.16@137,18.61 137,19.109 137.05,19.159 v2(137.05,19.2) ; U5.16@137.1,27.51 137.1,28.009 137.15,28.059 v2(137.15,28.1)
  L6 BOT w0.2: v2@126.662,27.738 126.7,27.777 126.7,28.266 ; R74.2@130.3,32.175 v3(130.3,31.55) 128.949,30.199 128.013,30.199 126.7,28.886 126.7,28.266 ; v2(137.05,19.2) 137.088,19.238 137.088,19.692 137.089,19.693 137.089,19.928 ; v2(137.15,28.1) 137.9,27.35 137.9,25.252 137.089,24.441 137.089,19.928 ; 126.7,28.266 127.85,27.116 127.85,24.686 127.65,24.486 127.65,22.152 127.736,22.066 127.736,19.732 127.43,19.425 127.077,19.425 126.771,19.118 126.771,18.853 v2(126.736,18.818) 127.55,18.818 128.3,18.068 130.5,18.068 130.9,17.668 131.173,17.668 131.562,17.279 132.02,17.279 132.284,17.543 132.284,18.302 134.432,20.45 136.567,20.45 137.089,19.928
TEC_SWEN_1: R41.2 R103.1 U5.13 | length 7
  L1 TOP w0.3: 140.775,26.8 140.925,26.65 141.223,26.65 141.373,26.5 v2(141.4,26.5)
  L6 BOT w0.2: R41.2@141.1,32.175 141.1,29.954 141.95,29.104 141.95,27.05 v2(141.4,26.5)
TEC_SWEN_2: R113.1 R285.1 U7.13 | length 48.3
  L1 TOP w0.2: v3(151,25.4) 151.824,26.224 151.824,26.455 152.61,27.241 152.61,34.262 152.775,34.427 152.775,42.522 152.375,42.922 152.375,45.056 151.9,45.531 151.9,46.936 151.2,47.636 v3(151.2,49.6)
  L1 TOP w0.3: 130.325,26.4 130.475,26.25 130.773,26.25 130.923,26.1 v2(130.95,26.1)
  L3 SIGNAL w0.2: v2(130.95,26.1) 134.686,26.1 135.787,27.2 140.063,27.2 141.239,26.025 146.761,26.025 147.386,25.4 v3(151,25.4)
  L6 BOT w0.2: R285.1@150.45,49.6 v3(151.2,49.6)
TEC_SWEN_3: R47.2 R105.1 U6.13 | length 50.6
  L6 BOT w0.2: 104.7,27.7 109.324,32.324 109.324,36.806 109.274,36.856 109.274,37.229 109.324,37.279 109.324,58.141 111.388,60.204 111.437,60.204 112.933,61.7 113.05,61.817 113.05,61.853 113.983,62.786 115.674,62.786 117.338,64.45 124.036,64.45 124.3,64.186 124.3,64.177 124.6,63.877 R47.2@124.6,63.825
TEC_SWEN_4: R48.2 R115.1 U8.13 | length 54
  L6 BOT w0.2: 102.5,27.1 108.4,33 108.4,57.782 111.222,60.604 111.272,60.604 112.368,61.7 112.65,61.982 112.65,62.019 113.817,63.186 114.688,63.186 116.352,64.85 125.1,64.85 125.5,64.45 R48.2@125.5,63.825
"TEMP _SENSOR": R157.2 R527.2
TMS_SWDIO_PC27: J23.8 U54.C1 | length 53.4
  L1 TOP w0.28: J23.8@36.34,14.3 36.34,21.075 v3(41.13,25.865)
  L3 SIGNAL w0.28: v3(41.13,25.865) 49.62,25.865 50.045,26.29 79.81,26.29 80.5,25.6
USB1_N: J14.2 R341.1 | length 67.1
  L1 TOP w0.22: v3(26.7,12.9) 26.734,12.866 26.897,12.866 28.241,11.522 37.355,11.522 38.64,10.237 38.64,7.464 38.616,7.44 38.616,6.776 J14.2@38.5,6.66
  L6 BOT w0.22: v3(26.7,12.9) 26.734,12.866 26.897,12.866 27.264,12.498 27.753,12.498 29.872,14.617 29.872,15.249 34.287,19.664 37.887,19.664 38.753,20.53 73.253,20.53
USB1_P: J14.3 R342.1 | length 66.9
  L1 TOP w0.22: v3(27.124,13.324) 27.159,13.29 27.159,13.127 28.394,11.892 37.508,11.892 39.01,10.39 39.01,7.464 39.034,7.44 39.034,6.776 J14.3@39.15,6.66
  L6 BOT w0.22: v3(27.124,13.324) 27.159,13.29 27.159,13.127 27.418,12.868 27.6,12.868 29.502,14.77 29.502,15.402 34.134,20.034 37.734,20.034 38.6,20.9 73.1,20.9
USB_CONN_LED_1: J3.4 R87.2 | length 32.1
  L1 TOP w0.2: R87.2@8.925,66.664 8.925,67.483 8.808,67.6 4.5,67.6 4.2,67.9 4.2,71.783 4.317,71.9 9.7,71.9 9.717,71.883 10.2,72.366 v3(10.2,75.6)
  L3 SIGNAL w0.2: v3(10.2,75.6) 10.207,75.6 10.557,75.25 20.55,75.25 v3(21.3,76)
  L6 BOT w0.2: J3.4@21.25,74.6 21.3,74.65 v3(21.3,76)
USB_PWR1: C193.2 D4.5 J3.1 Q1.2 R85.1 R94.1 U4.8 | length 4.2
  L1 TOP w0.2: Q1.2@5.4,64.614 5.475,64.539 7.8,64.539 R85.1@7.875,64.464
  L1 TOP w0.4: R94.1@29.825,67.1 29.867,67.058 31.448,67.058 U4.8@31.49,67.016
USB_PWR2: C194.2 D5.5 J4.1 Q2.2 R90.1 R93.1 U4.5 | length 4.3
  L1 TOP w0.2: Q2.2@5.4,68.814 5.475,68.739 7.8,68.739 R90.1@7.875,68.664
  L1 TOP w0.4: R93.1@29.725,70.9 29.762,70.863 31.453,70.863 U4.5@31.49,70.826
USBA_N: R336.2 U54.B3 | length 0.3
  L6 BOT w0.15: U54.B3@86.15,38.6 v3(86.336,38.786)
USBA_P: R337.2 U54.A3
USBB_N: R341.2 U54.B4
USBB_P: R342.2 U54.A4
USBC_N: R345.2 U54.B6
USBC_P: R346.2 U54.A6
VDD_1V15_OUT3: C226.2 L7.2 R326.1 U34.25
VDD_1V15_OUT4: C228.2 L8.2 R330.1 U34.32
VDD_1V35: C224.2 L6.2 R335.1 U34.16
VDD_3V3: C116.2 C117.2 C118.2 C119.2 C122.2 C123.2 C124.2 C125.2 C126.2 C127.2 C128.2 C129.2 C130.2 C131.2 C132.2 C176.2 C192.2 C220.1 C221.1 C222.1 C223.1 C273.2 C285.2 D34.2 D35.2 J15.P4 J16.1 J23.2 L5.2 R191.2 R192.2 R193.2 R194.2 R195.2 R196.2 R197.1 R198.2 R199.2 R200.2 R201.2 R202.2 R203.2 R204.2 R205.2 R206.2 R207.2 R208.2 R209.2 R210.2 R298.1 R303.1 R312.1 R318.1 R323.2 R324.2 R331.2 R334.1 R339.2 R469.2 R476.2 R535.2 R542.2 R546.2 R548.2 R550.2 R570.2 R571.2 U20.5 U21.5 U22.F2@55.086,58.6 U22.F3@55.086,57.6 U22.F4@55.086,56.6 U22.F5@55.086,55.6 U22.F6@55.086,54.6 U22.F7@55.086,53.6 U22.F8@55.086,52.6 U22.F9@55.086,51.6 U22.H3@57.086,57.6 U22.H8@57.086,52.6 U22.L2@60.086,58.6 U22.L4@60.086,56.6 U22.L7@60.086,53.6 U22.L9@60.086,51.6 U22.P3@63.086,57.6 U22.P8@63.086,52.6 U34.9 U47.8 U53.2 U53.15 Y2.4 Y4.1 Y4.4 | length 25.4
  L1 TOP w0.254: R196.2@18.975,16.9 R196.2@19,16.9 19.816,17.716 19.816,17.829 C117.2@19.987,18 ; U21.5@21.624,18.075 21.587,18.038 20.037,18.038 C117.2@20,18 C117.2@19.987,18 ; U20.5@21.624,21.825 21.612,21.812 20.712,21.812 v3(20.7,21.8) 19.987,21.8 19.816,21.629 19.816,21.416 R191.2@19,20.6 18.975,20.6 18.975,19.1 R194.2@19,19.1 19.816,18.284 19.816,18.171 C117.2@19.987,18
  L1 TOP w0.28: v3(8.6,18) J15.P4@9.5,18
  L6 BOT w0.254: v3(8.6,18) 10.167,19.567 20.042,19.567 21.177,20.702 21.177,21.323 v3(20.7,21.8)
VDD_3V3_MPU: C233.1 C234.1 C241.1 C242.1 C243.1 C244.1 C245.1 C246.1 C247.1 C248.1 C249.1 R332.2 R333.2 R334.2 U54.C11 U54.C14 U54.C17 U54.F13 U54.H19 U54.J16 U54.N16 U54.T13 U54.W14
VDDANA: C253.2 C275.1 C276.1 C277.1 C283.1 C284.1 U54.E5 U54.E6 U54.G6 U54.J6 U54.T15 U54.T16
VDDBU: C281.1 R322.2 R343.2 R364.2 R370.2 U54.P11
VDDCORE: C250.1 C251.1 C252.1 C254.1 C255.1 C256.1 C257.1 C258.1 C259.1 C260.1 C261.1 C262.1 C263.1 C264.1 C265.1 C266.1 R326.2 U54.F6 U54.F9 U54.F15 U54.J9 U54.J13 U54.L3 U54.L19 U54.N13 U54.P19 U54.U16 U54.U17 U54.U19 U54.W17 U54.Y20
VDDCPU: C235.1 C236.1 C237.1 C238.1 C239.1 C240.1 R330.2 U54.B20 U54.E16 U54.E17 U54.E19 U54.F16
VDDIN33: C279.1 C280.1 R332.1 R364.1 U54.H3
VDDIODDR: C332.1 C333.1 C334.1 C335.1 C336.1 C337.1 C338.1 C339.1 C340.1 C341.1 C342.1 C343.1 C344.1 C345.1 C346.1 C348.1 C349.1 C350.1 R335.2 R574.1 R576.1 U54.AA5 U54.M11 U54.N6 U54.N9 U54.N12 U54.P3 U54.P13 U54.T6 U54.T7 U54.T9 U54.U3 U54.U5 U54.U6 U54.W8 U54.Y2
VDDUTMII: C267.1 C268.1 C269.1 C270.1 C272.1 C274.1 R333.1 U54.B2 U54.C5 U54.C8 U54.E3 U54.F7 | length 0.3
  L6 BOT w0.15: U54.B2@86.15,37.95 v3(86.336,38.136)
VLDO1: C231.1 U34.19
VLDO2: C232.1 U34.21
VUSB: J14.1 JP2.2
WD_DONE: R293.1 U39.4 | length 10.4
  L1 TOP w0.2: v3(118.8,41.8) 120.589,41.8 124.939,46.15 U39.4@126.745,46.15
  L6 BOT w0.2: v3(118.8,41.8) R293.1@119.475,41.8
WD_nRESET: R45.2 R394.2 R400.1 | length 1.3
  L1 TOP w0.2: R400.1@129.625,42.9 R394.2@130.875,42.9
WD_WAKE: R294.1 U39.5 | length 13.7
  L1 TOP w0.2: v3(118.8,42.7) 120.2,42.7 123.2,45.7 123.2,46.059 123.886,46.745 127.431,46.745 127.65,46.526 127.65,45.317 127.533,45.2 U39.5@126.745,45.2
  L6 BOT w0.2: v3(118.8,42.7) R294.1@119.475,42.7
WKUP: R322.1 U34.7 U54.AA15
XIN: R359.2 R362.2 U54.J2
XIN32: C271.1 R361.1 R363.2 U54.Y13 Y1.2
XIN_24M: C282.1 R362.1 R580.1 Y3.3
XOUT: R360.2 R369.2 U54.J1
XOUT32: C278.1 R361.2 U54.AA13 Y1.1
XOUT_24M: C286.1 R369.1 R580.2 Y3.1
ZQ_DDR: R573.1 U56.L8
pads on no net: J2.1 J2.7 J11.6 J12.6 J14.4 J15.14 J15.15 J23.1 J31.6 J32.6 TP5.0 TP6.0 TP7.0 TP8.0 TP9.0 TP10.0 TP11.0 TP12.0 TP13.0 TP14.0 TP15.0 TP18.0 TP20.0 TP22.0 TP25.0 TP26.0 TP27.0 TP28.0 TP29.0 TP30.0 TP31.0 TP32.0 TP33.0 TP34.0 U3.7 U3.8 U3.9 U3.10 U3.16 U4.2 U4.3 U9.10 U9.12 U9.13 U15.23 U15.24 U15.25 U15.26 U20.4 U21.1 U22.A1 U22.A2 U22.A9 U22.A10 U22.B1 U22.B10 U22.D2 U22.D3 U22.D4 U22.D5 U22.D6 U22.D7 U22.D8 U22.D9 U22.E2 U22.E3 U22.E4@54.086,56.6 U22.E5 U22.E6 U22.E7 U22.E8 U22.E9 U22.F2@55.086,58.6 U22.F3@55.086,57.6 U22.F4@55.086,56.6 U22.F5@55.086,55.6 U22.F6@55.086,54.6 U22.F7@55.086,53.6 U22.F8@55.086,52.6 U22.F9@55.086,51.6 U22.G2@56.086,58.6 U22.G3@56.086,57.6 U22.G4@56.086,56.6 U22.G5@56.086,55.6 U22.G6@56.086,54.6 U22.G7@56.086,53.6 U22.G8@56.086,52.6 U22.G9@56.086,51.6 U22.H2@57.086,58.6 U22.H3@57.086,57.6 U22.H4 U22.H5 U22.H6 U22.H7 U22.H8@57.086,52.6 U22.H9@57.086,51.6 U22.J2 U22.J3 U22.J4 U22.J5@58.086,55.6 U22.J6 U22.J7 U22.J8 U22.J9 U22.K2@59.086,58.6 U22.K3@59.086,57.6 U22.K4 U22.K5@59.086,55.6 U22.K6 U22.K7 U22.K8@59.086,52.6 U22.K9@59.086,51.6 U22.L2@60.086,58.6 U22.L3@60.086,57.6 U22.L4@60.086,56.6 U22.L5 U22.L6 U22.L7@60.086,53.6 U22.L8@60.086,52.6 U22.L9@60.086,51.6 U22.M2 U22.M3 U22.M4@61.086,56.6 U22.M5@61.086,55.6 U22.M6 U22.M7@61.086,53.6 U22.M8 U22.M9 U22.N2@62.086,58.6 U22.N3@62.086,57.6 U22.N4 U22.N5 U22.N6 U22.N7 U22.N8@62.086,52.6 U22.N9@62.086,51.6 U22.P2@63.086,58.6 U22.P3@63.086,57.6 U22.P4 U22.P5@63.086,55.6 U22.P6@63.086,54.6 U22.P7 U22.P8@63.086,52.6 U22.P9@63.086,51.6 U22.T1 U22.T10 U22.U1 U22.U2 U22.U9 U22.U10 U34.17 U36.8 U36.10 U40.4 U41.24 U42.3 U42.4 U42.10 U42.12 U42.20 U42.22 U42.24 U43.24 U52.2 U52.3 U52.9 U52.10 U52.11 U54.A15 U54.A16 U54.A20 U54.AA18 U54.AA19 U54.B13 U54.B15 U54.B18 U54.C2 U54.C3 U54.C4 U54.C7 U54.C18 U54.C19 U54.C20 U54.D2 U54.D3 U54.D4 U54.D7 U54.D16 U54.D17 U54.D21 U54.E4 U54.E8 U54.E14 U54.E18 U54.F3 U54.F4 U54.F14 U54.F18 U54.F19 U54.F21 U54.G3 U54.G4 U54.G8 U54.G9 U54.G12 U54.G14 U54.G16 U54.G19 U54.H12 U54.H15 U54.H18 U54.J11 U54.J14 U54.J20 U54.J21 U54.K7 U54.K8 U54.M12 U54.M13 U54.M14 U54.P9 U54.P10 U54.P12 U54.R12 U54.R13 U54.U14 U54.V15 U54.V19 U54.V20 U54.V21 U54.W11 U54.Y15 U54.Y19 U56.J1 U56.J9 U56.L1 U56.L9
copper on no net: | length 127.3
  L1 TOP w0.15: 144.2,20.925 144.2,20.951 144.7,21.451 144.7,22.265 ; 145.1,20.925 145.1,22.265
  L1 TOP w0.2: v3(131.9,39.3) 131.912,39.312 131.912,42.888 131.925,42.9
  L1 TOP w0.25: 123.361,19.218 123.411,19.268 124.261,19.268 124.311,19.318 124.324,19.306 124.324,18.531 v2(124.336,18.518) ; v2(125.036,18.818) 125.065,18.847 125.065,19.033 125.35,19.318 125.361,19.318 ; 127.825,26.2 128.4,26.2 128.6,26.4 129.275,26.4 129.275,27.3 ; 127.861,17.318 128.436,17.318 128.636,17.518 129.311,17.518 129.311,18.418 ; 133.675,19.6 133.725,19.65 134.575,19.65 134.625,19.7 134.637,19.688 134.637,18.913 v2(134.65,18.9) ; 133.775,28.5 133.825,28.55 134.675,28.55 134.725,28.6 134.737,28.588 134.737,27.813 v2(134.75,27.8) ; 138.175,17.7 138.75,17.7 138.95,17.9 139.625,17.9 139.625,18.8 ; 138.275,26.6 138.85,26.6 139.05,26.8 139.725,26.8 139.725,27.7
  L3 SIGNAL w0.2: 59,34.4 59.007,34.4 59.457,33.95 86.342,33.95 86.642,34.25 97.85,34.25 98.9,35.3 119.1,35.3 123.1,39.3 v3(131.9,39.3) ; v3(122.8,31.3) 126.52,31.3 126.77,31.05 130.896,31.05 131.146,31.3 v3(131.2,31.3)
  L6 BOT w0.2: v3(122.8,31.3) 122.8,26.178 123.3,25.678 123.3,24.498 125.036,22.762 v2(125.036,18.818) ; v2(124.336,18.518) 124.374,18.48 124.374,18.244 125.15,17.468 v2(125.961,17.468) ; v3(131.2,31.3) 131.2,32.175 ; v2(134.65,18.9) 134.65,18.266 135.066,17.85 v2(136.275,17.85) ; v2(134.75,27.8) 134.788,27.762 134.788,27.525 135.563,26.75 v2(136.375,26.75)

## Keep-outs
L1 TOP:
  rectangle: 10.163,13.495 16.363,22.895
Keep-Out Layer:
  lines w1: 6.618,1 173.382,1 ; 6.618,1.001 cw(c4,4) 0.02,3.978 0,76 cw(c4,76) 4,80 176,80 cw(c176,76) 180,76 180,4 ; 173.382,1.001 ccw(c176,4) 179.98,3.978

## Other copper
L1 TOP:
  region net GND: 22.292,43.665 18.192,43.665 15.965,43.665 15.9,43.6 15.9,43.2 16.035,43.065 17.593,43.065 17.693,42.965 17.693,40.565 17.951,40.562 17.951,41.623 18.193,41.865 18.193,42.866 18.392,43.065 19.492,43.065 19.692,42.865 19.692,41.065 19.892,40.865 22.092,40.865 22.292,41.065
  region net GND: 22.292,53.065 18.192,53.065 15.965,53.065 15.9,53 15.9,52.6 16.035,52.465 17.593,52.465 17.693,52.365 17.693,49.965 17.951,49.962 17.951,51.023 18.193,51.265 18.193,52.266 18.392,52.465 19.492,52.465 19.692,52.265 19.692,50.465 19.892,50.265 22.092,50.265 22.292,50.465
  region net GND: 22.292,62.465 18.192,62.465 15.965,62.465 15.9,62.4 15.9,62 16.035,61.865 17.593,61.865 17.693,61.765 17.693,59.365 17.951,59.362 17.951,60.423 18.193,60.665 18.193,61.666 18.392,61.865 19.492,61.865 19.692,61.665 19.692,59.865 19.892,59.665 22.092,59.665 22.292,59.865
  region net GND: 22.292,34.465 18.192,34.465 15.965,34.465 15.9,34.4 15.9,34 16.035,33.865 17.593,33.865 17.693,33.765 17.693,31.365 17.951,31.362 17.951,32.423 18.193,32.665 18.193,33.666 18.392,33.865 19.492,33.865 19.692,33.665 19.692,31.865 19.892,31.665 22.092,31.665 22.292,31.865
  region net GND: 138.016,25.15 138.016,24.834 138.45,24.4 139.65,24.4 140.05,24 140.05,21.5 140.25,21.3 141.25,21.3 141.35,21.4 141.35,24.4 141.15,24.6 140.45,24.6 139.899,25.15
  region net GND: 136.05,26.3 137.65,26.3 137.65,25.3 136.05,25.3
  region net GND: 132.15,22.5 132.15,24.4 132.25,24.5 133.45,24.5 133.55,24.6 133.55,24.7 133.65,24.8 134.75,24.8 135.09,25.14 135.65,25.14 135.65,23.7 135.35,23.4 133.45,23.4 133.05,23 133.05,22.5 132.95,22.4 132.25,22.4
  region net GND: 135.95,17.4 137.55,17.4 137.55,16.4 135.95,16.4
  region net GND: 137.916,16.25 137.916,15.934 138.35,15.5 139.55,15.5 139.95,15.1 139.95,12.6 140.15,12.4 141.15,12.4 141.25,12.5 141.25,15.5 141.05,15.7 140.35,15.7 139.799,16.25
  region net GND: 132.05,13.6 132.05,15.5 132.15,15.6 133.35,15.6 133.45,15.7 133.45,15.8 133.55,15.9 134.65,15.9 134.99,16.24 135.55,16.24 135.55,14.8 135.25,14.5 133.35,14.5 132.95,14.1 132.95,13.6 132.85,13.5 132.15,13.5
  region net GND: 127.566,24.75 127.566,24.434 128,24 129.2,24 129.6,23.6 129.6,21.1 129.8,20.9 130.8,20.9 130.9,21 130.9,24 130.7,24.2 130,24.2 129.45,24.75
  region net GND: 125.6,25.9 127.2,25.9 127.2,24.9 125.6,24.9
  region net GND: 125.636,17.018 127.236,17.018 127.236,16.018 125.636,16.018
  region net GND: 127.603,15.869 127.603,15.552 128.036,15.118 129.236,15.118 129.636,14.718 129.636,12.218 129.836,12.018 130.836,12.018 130.936,12.118 130.936,15.118 130.736,15.318 130.036,15.318 129.486,15.869
  region net GND: 121.7,22.1 121.7,24 121.8,24.1 123,24.1 123.1,24.2 123.1,24.3 123.2,24.4 124.3,24.4 124.64,24.74 125.2,24.74 125.2,23.3 124.9,23 123,23 122.6,22.6 122.6,22.1 122.5,22 121.8,22
  region net GND: 121.736,13.218 121.736,15.118 121.836,15.218 123.036,15.218 123.136,15.318 123.136,15.418 123.236,15.518 124.336,15.518 124.677,15.859 125.236,15.859 125.236,14.418 124.936,14.118 123.036,14.118 122.636,13.718 122.636,13.218 122.536,13.118 121.836,13.118
  region net GND: 12.492,34.965 8.392,34.965 6.165,34.965 6.1,34.9 6.1,34.5 6.235,34.365 7.793,34.365 7.893,34.265 7.893,31.865 8.151,31.862 8.151,32.923 8.393,33.165 8.393,34.166 8.592,34.365 9.692,34.365 9.892,34.165 9.892,32.365 10.092,32.165 12.292,32.165 12.492,32.365
  region net GND: 12.492,53.265 8.392,53.265 6.165,53.265 6.1,53.2 6.1,52.8 6.235,52.665 7.793,52.665 7.893,52.565 7.893,50.165 8.151,50.162 8.151,51.223 8.393,51.465 8.393,52.466 8.592,52.665 9.692,52.665 9.892,52.465 9.892,50.665 10.092,50.465 12.292,50.465 12.492,50.665
  region net GND: 12.492,62.465 8.392,62.465 6.165,62.465 6.1,62.4 6.1,62 6.235,61.865 7.793,61.865 7.893,61.765 7.893,59.365 8.151,59.362 8.151,60.423 8.393,60.665 8.393,61.666 8.592,61.865 9.692,61.865 9.892,61.665 9.892,59.865 10.092,59.665 12.292,59.665 12.492,59.865
  region net GND: 12.492,44.065 8.392,44.065 6.165,44.065 6.1,44 6.1,43.6 6.235,43.465 7.793,43.465 7.893,43.365 7.893,40.965 8.151,40.962 8.151,42.023 8.393,42.265 8.393,43.266 8.592,43.465 9.692,43.465 9.892,43.265 9.892,41.465 10.092,41.265 12.292,41.265 12.492,41.465
  region net +5V_USB_ADT1: 18.808,30.585 18.808,30.285 16.058,30.285 15.607,29.834 15.607,29.634 15.508,29.535 13.908,29.535 13.807,29.636 13.807,31.907 14.034,32.135 15.407,32.135 15.607,31.935 15.607,31.235 16.257,30.585
  region net +5V_SAMA7: 13.893,33.065 13.893,34.465 13.993,34.565 15.393,34.565 15.493,34.465 15.493,33.065 15.393,32.965 13.993,32.965
  region net +5V_ADT2: 18.808,49.185 18.808,48.885 16.058,48.885 15.607,48.434 15.607,48.234 15.508,48.135 13.908,48.135 13.807,48.236 13.807,50.507 14.034,50.735 15.407,50.735 15.607,50.535 15.607,49.835 16.257,49.185
  region net +12V_Laser: 13.893,61.065 13.893,62.465 13.993,62.565 15.393,62.565 15.493,62.465 15.493,61.065 15.393,60.965 13.993,60.965
  region net +12V_ADT2: 18.808,58.585 18.808,58.285 16.058,58.285 15.607,57.834 15.607,57.634 15.508,57.535 13.908,57.535 13.807,57.636 13.807,59.907 14.034,60.135 15.407,60.135 15.607,59.935 15.607,59.235 16.257,58.585
  region net +5V_USB_ADT2: 18.808,39.785 18.808,39.485 16.058,39.485 15.607,39.034 15.607,38.834 15.508,38.735 13.908,38.735 13.807,38.836 13.807,41.107 14.034,41.335 15.407,41.335 15.607,41.135 15.607,40.435 16.257,39.785
  region net +5V: 13.893,51.665 13.893,53.065 13.993,53.165 15.393,53.165 15.493,53.065 15.493,51.665 15.393,51.565 13.993,51.565
  region net +5V_MCU: 13.893,42.265 13.893,43.665 13.993,43.765 15.393,43.765 15.493,43.665 15.493,42.265 15.393,42.165 13.993,42.165
  region net +5/12V_Solenoid: 12.5,28.626 12.5,31.585 11.615,31.585 6.607,31.585 6.607,31.285 9.215,31.285 9.4,31.1 9.4,30.327 10.501,29.226 10.501,27.627 10.208,27.335 8.708,27.335 8.601,27.227 8.601,26.799 8.674,26.726 12.326,26.726 12.5,26.9
  region net +5/12V_Solenoid: 4.093,33.565 4.093,34.965 4.193,35.065 5.593,35.065 5.693,34.965 5.693,33.565 5.593,33.465 4.193,33.465
  region net +3.3V: 127.636,17.918 127.936,18.218 127.936,18.818 128.036,18.918 128.036,19.518 128.136,19.618 129.536,19.618 129.636,19.518 129.636,19.118 129.536,19.018 128.636,19.018 128.336,18.718 128.336,17.918 128.136,17.718 127.636,17.718
  region net +3.3V: 127.6,26.8 127.9,27.1 127.9,27.7 128,27.8 128,28.4 128.1,28.5 129.5,28.5 129.6,28.4 129.6,28 129.5,27.9 128.6,27.9 128.3,27.6 128.3,26.8 128.1,26.6 127.6,26.6
  region net +3.3V: 137.95,18.3 138.25,18.6 138.25,19.2 138.35,19.3 138.35,19.9 138.45,20 139.85,20 139.95,19.9 139.95,19.5 139.85,19.4 138.95,19.4 138.65,19.1 138.65,18.3 138.45,18.1 137.95,18.1
  region net +3.3V: 138.05,27.2 138.35,27.5 138.35,28.1 138.45,28.2 138.45,28.8 138.55,28.9 139.95,28.9 140.05,28.8 140.05,28.4 139.95,28.3 139.05,28.3 138.75,28 138.75,27.2 138.55,27 138.05,27
  region net NetC141_2: 9.008,31.085 9.008,30.785 6.258,30.785 5.807,30.334 5.807,30.134 5.708,30.035 4.108,30.035 4.007,30.136 4.007,32.407 4.234,32.635 5.607,32.635 5.807,32.435 5.807,31.735 6.457,31.085
  region net +5V_ADT2: 9.008,40.185 9.008,39.885 6.258,39.885 5.807,39.434 5.807,39.234 5.708,39.135 4.108,39.135 4.007,39.236 4.007,41.507 4.234,41.735 5.607,41.735 5.807,41.535 5.807,40.835 6.457,40.185
  region net +5V_ADT2: 9.008,49.385 9.008,49.085 6.258,49.085 5.807,48.634 5.807,48.434 5.708,48.335 4.108,48.335 4.007,48.436 4.007,50.707 4.234,50.935 5.607,50.935 5.807,50.735 5.807,50.035 6.457,49.385
  region net +12V_Photo: 4.093,61.065 4.093,62.465 4.193,62.565 5.593,62.565 5.693,62.465 5.693,61.065 5.593,60.965 4.193,60.965
  region net NetC78_1: 125.636,15.718 125.636,14.518 126.036,14.118 126.036,12.018 126.136,11.918 127.036,11.918 127.136,12.018 127.136,13.918 126.236,14.818 126.236,15.718
  region net NetC77_1: 125.6,24.6 125.6,23.4 126,23 126,20.9 126.1,20.8 127,20.8 127.1,20.9 127.1,22.8 126.2,23.7 126.2,24.6
  region net NetC56_1: 135.95,16.1 135.95,14.9 136.35,14.5 136.35,12.4 136.45,12.3 137.35,12.3 137.45,12.4 137.45,14.3 136.55,15.2 136.55,16.1
  region net NetC55_1: 136.05,25 136.05,23.8 136.45,23.4 136.45,21.3 136.55,21.2 137.45,21.2 137.55,21.3 137.55,23.2 136.65,24.1 136.65,25
  region net +5V_TEC: 4.093,42.665 4.093,44.065 4.193,44.165 5.593,44.165 5.693,44.065 5.693,42.665 5.593,42.565 4.193,42.565
  region net TEC_OUT_B_4: 121.836,12.718 121.736,12.618 121.736,12.018 121.836,11.918 124.236,11.918 124.336,12.018 124.336,13.618 124.236,13.718 123.236,13.718 123.136,13.618 123.136,12.918 122.936,12.718 121.936,12.718
  region net TEC_OUT_B_3: 132.15,13.1 132.05,13 132.05,12.4 132.15,12.3 134.55,12.3 134.65,12.4 134.65,14 134.55,14.1 133.55,14.1 133.45,14 133.45,13.3 133.25,13.1 132.25,13.1
  region net TEC_OUT_B_2: 121.8,21.6 121.7,21.5 121.7,20.9 121.8,20.8 124.2,20.8 124.3,20.9 124.3,22.5 124.2,22.6 123.2,22.6 123.1,22.5 123.1,21.8 122.9,21.6 121.9,21.6
  region net TEC_OUT_B_1: 132.25,22 132.15,21.9 132.15,21.3 132.25,21.2 134.65,21.2 134.75,21.3 134.75,22.9 134.65,23 133.65,23 133.55,22.9 133.55,22.2 133.35,22 132.35,22
  region net TEC_OUT_A_4: 126.636,15.718 126.636,14.818 127.536,13.918 128.286,13.168 128.286,12.068 128.336,12.018 129.136,12.018 129.236,12.118 129.236,13.618 128.136,14.718 127.736,14.718 127.186,15.268 127.186,15.718
  region net TEC_OUT_A_3: 136.95,16.1 136.95,15.2 137.85,14.3 138.6,13.55 138.6,12.45 138.65,12.4 139.45,12.4 139.55,12.5 139.55,14 138.45,15.1 138.05,15.1 137.5,15.65 137.5,16.1
  region net TEC_OUT_A_2: 126.6,24.6 126.6,23.7 127.5,22.8 128.25,22.05 128.25,20.95 128.3,20.9 129.1,20.9 129.2,21 129.2,22.5 128.1,23.6 127.7,23.6 127.15,24.15 127.15,24.6
  region net TEC_OUT_A_1: 137.05,25 137.05,24.1 137.95,23.2 138.7,22.45 138.7,21.35 138.75,21.3 139.55,21.3 139.65,21.4 139.65,22.9 138.55,24 138.15,24 137.6,24.55 137.6,25
  region net +12V_ADT2: 9.008,58.585 9.008,58.285 6.258,58.285 5.807,57.834 5.807,57.634 5.708,57.535 4.108,57.535 4.007,57.636 4.007,59.907 4.234,60.135 5.607,60.135 5.807,59.935 5.807,59.235 6.457,58.585
  region net +5V_HD4: 4.093,51.865 4.093,53.265 4.193,53.365 5.593,53.365 5.693,53.265 5.693,51.865 5.593,51.765 4.193,51.765

## Silkscreen, mask and mechanical layers (free items; w line width, h text height)
Top Overlay:
  drawing of 17 lines, arcs and shapes, not listed
  text "Designed by: Cam Doan" at 71.712,-7.747 h1.5
  text "Checked by: Bao Bui" at 72.518,-8.847 h1.5
  text "Approved by: Vu Pham" at 72.348,-10.238 h1.5
  text "BEE-1006  PAY-EXP V1.1.0" at 40.449,-13.915 h2.3
Bottom Overlay:
  drawing of 2 lines, arcs and shapes, not listed